# Altium PCB GaN_Single_Bridge.PcbDoc
Units mil, origin at the board's own origin, x right, y up, seen from the top; angles counter-clockwise.
Board outline 4724.41 x 2755.91 mil, 4 copper layers (Top Layer, Layer 1, Layer 2, Bottom Layer), stack 23.756 mil thick; 76 components, 36 nets, 233 pads, 112 vias.
Unrouted connection lines stored in the file: 26.
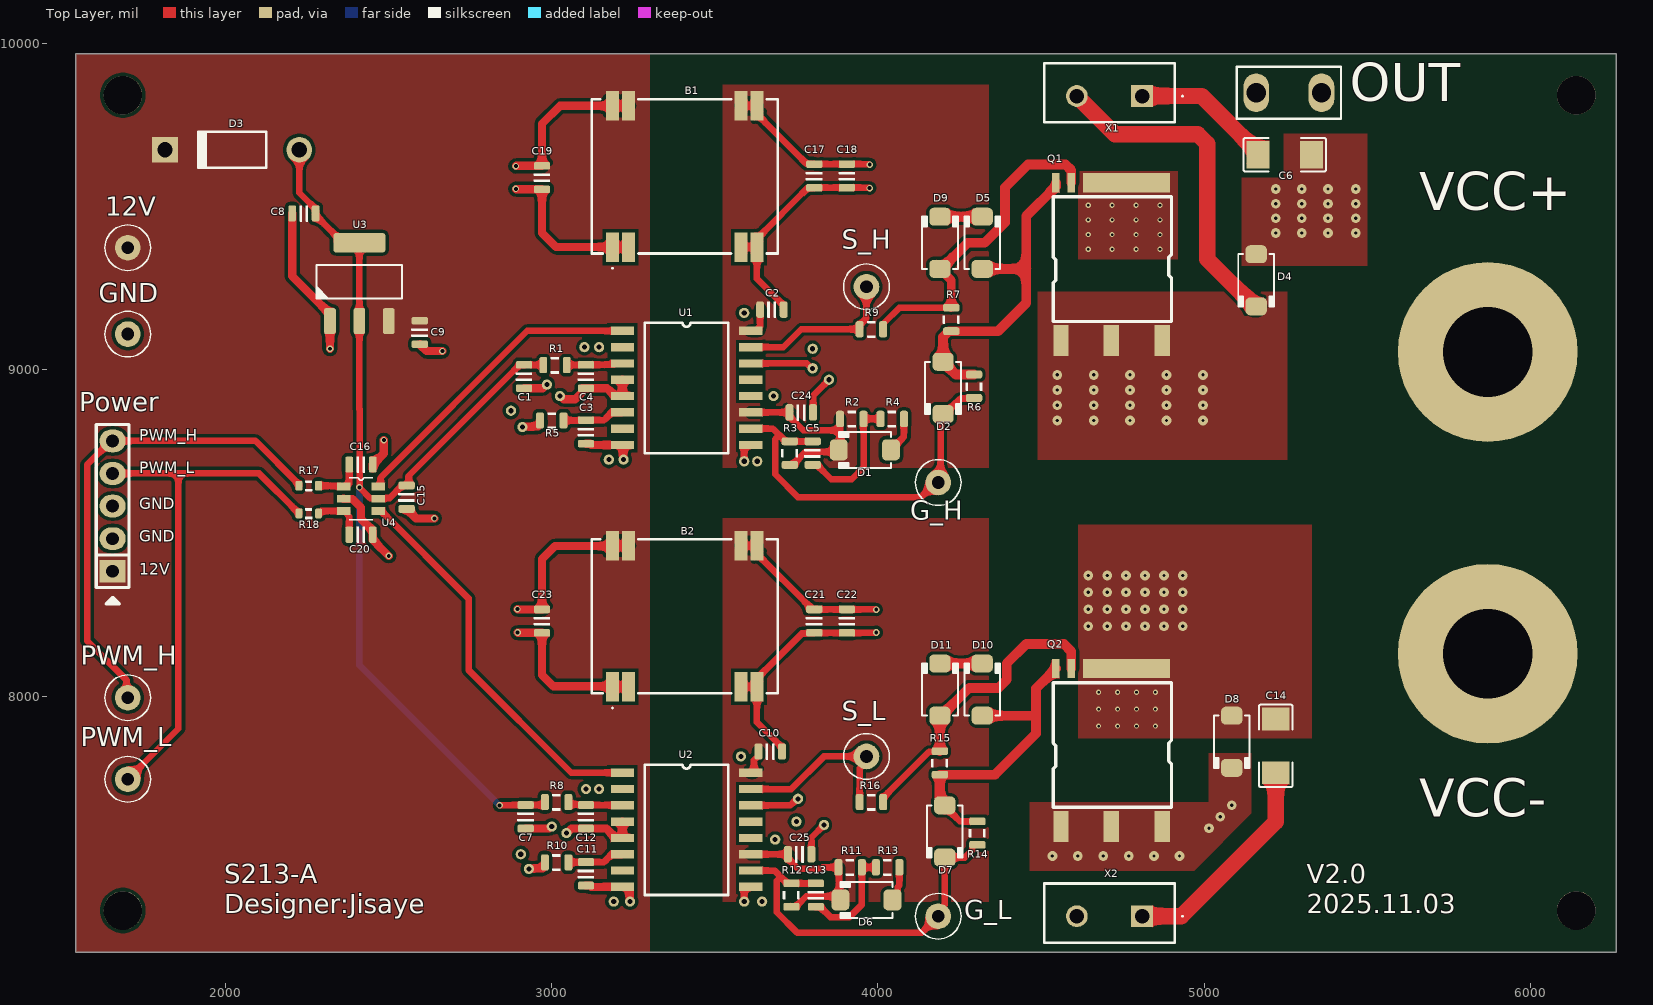
[diagram p0: Top Layer view]
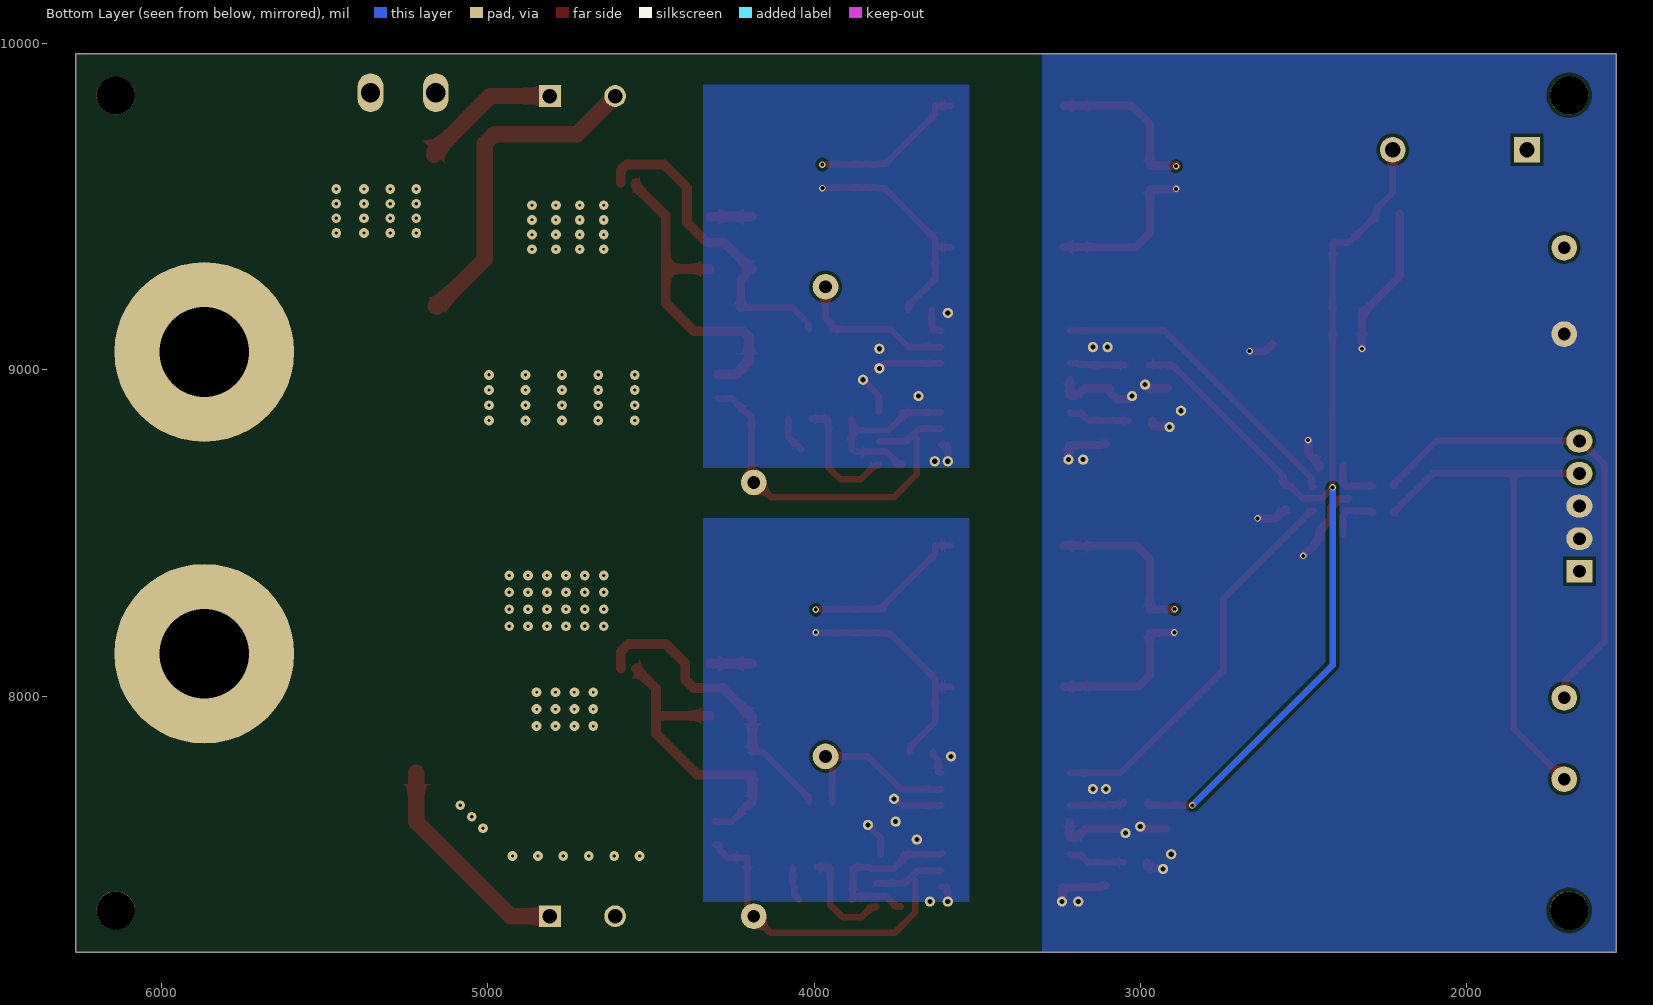
[diagram p1: Bottom Layer view, seen from below]
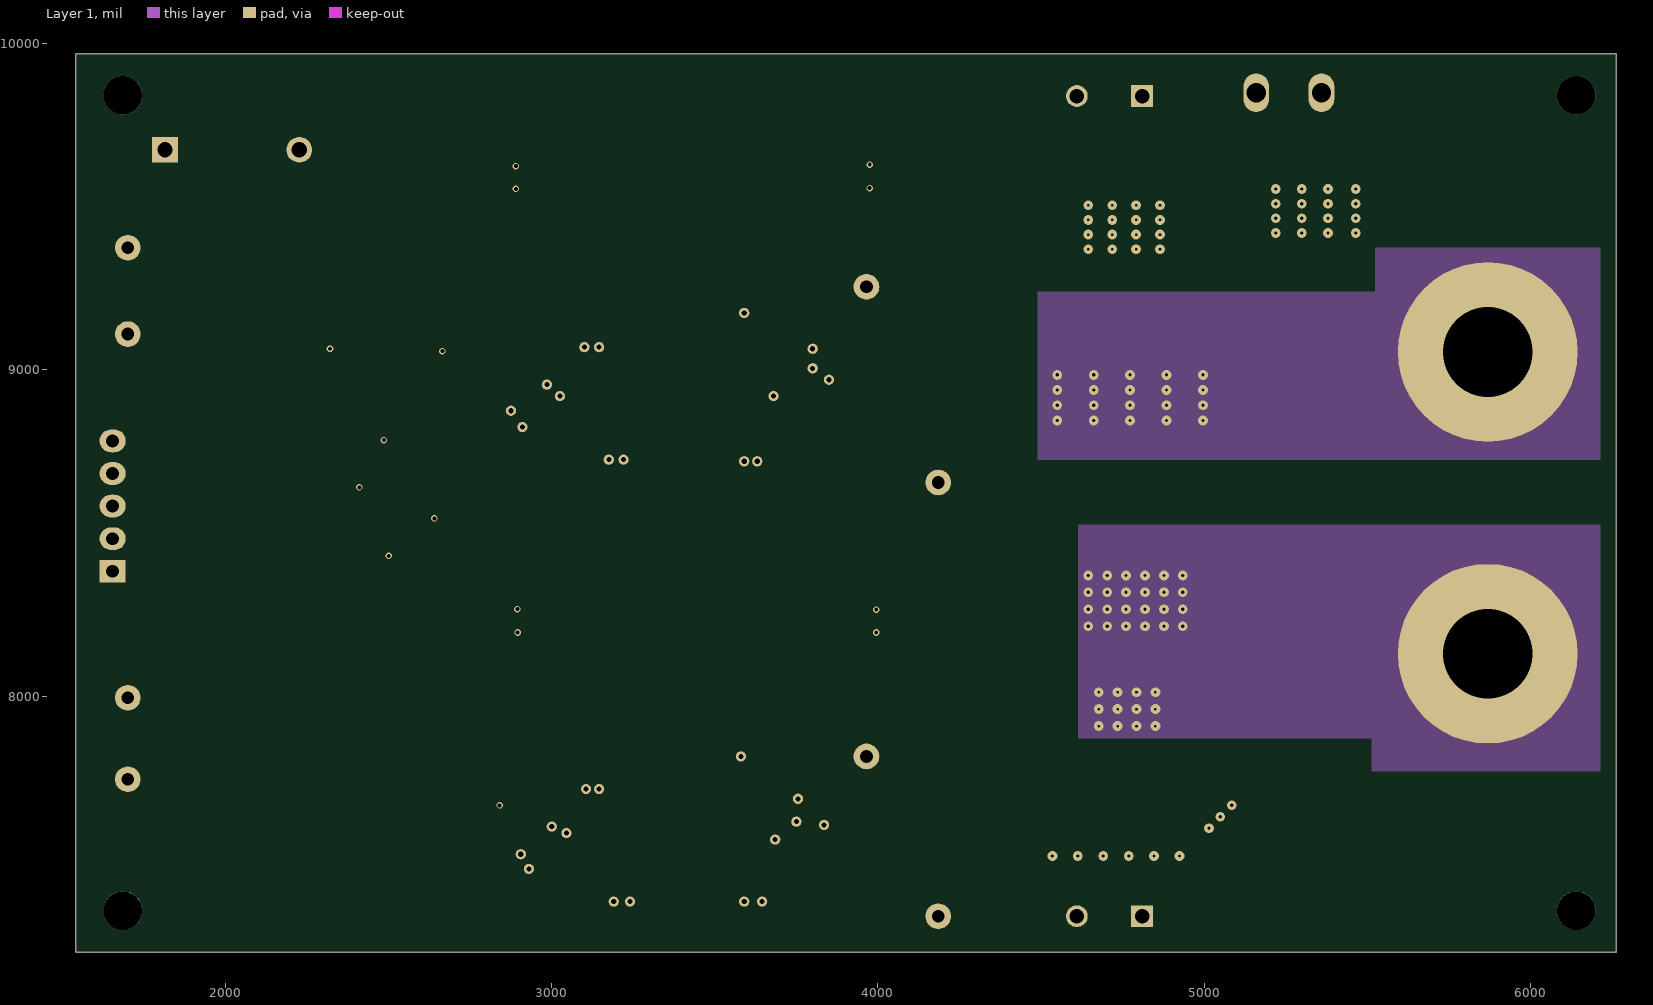
[diagram p2: Layer 1]
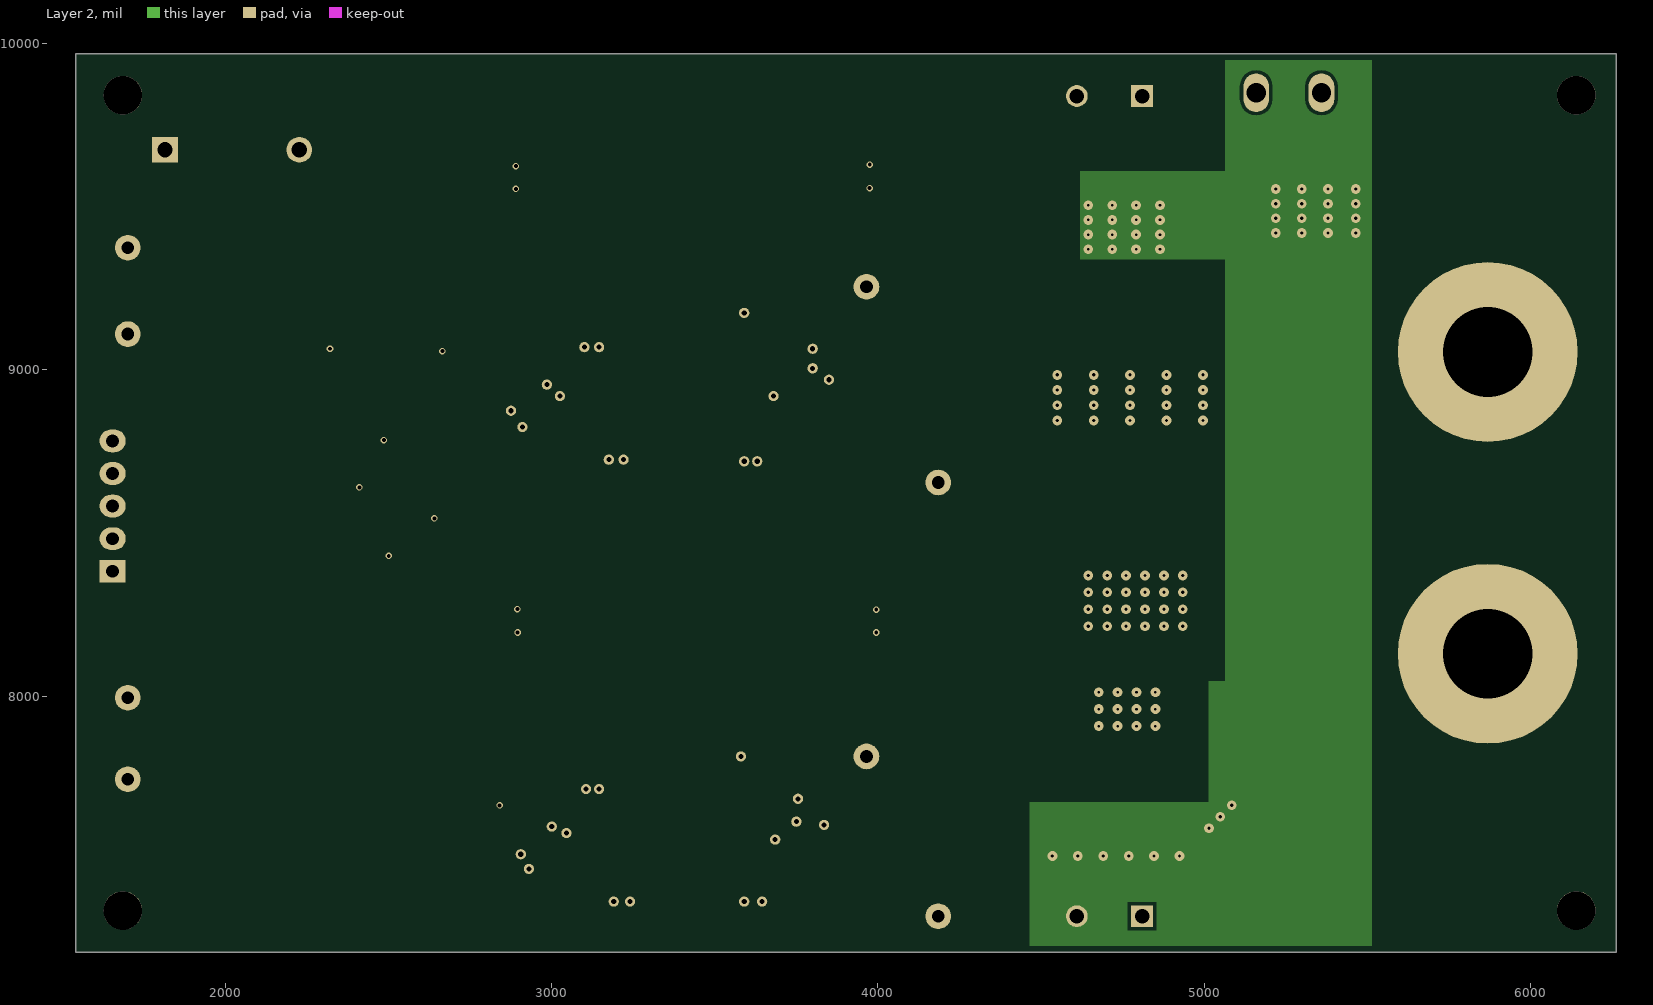
[diagram p3: Layer 2]
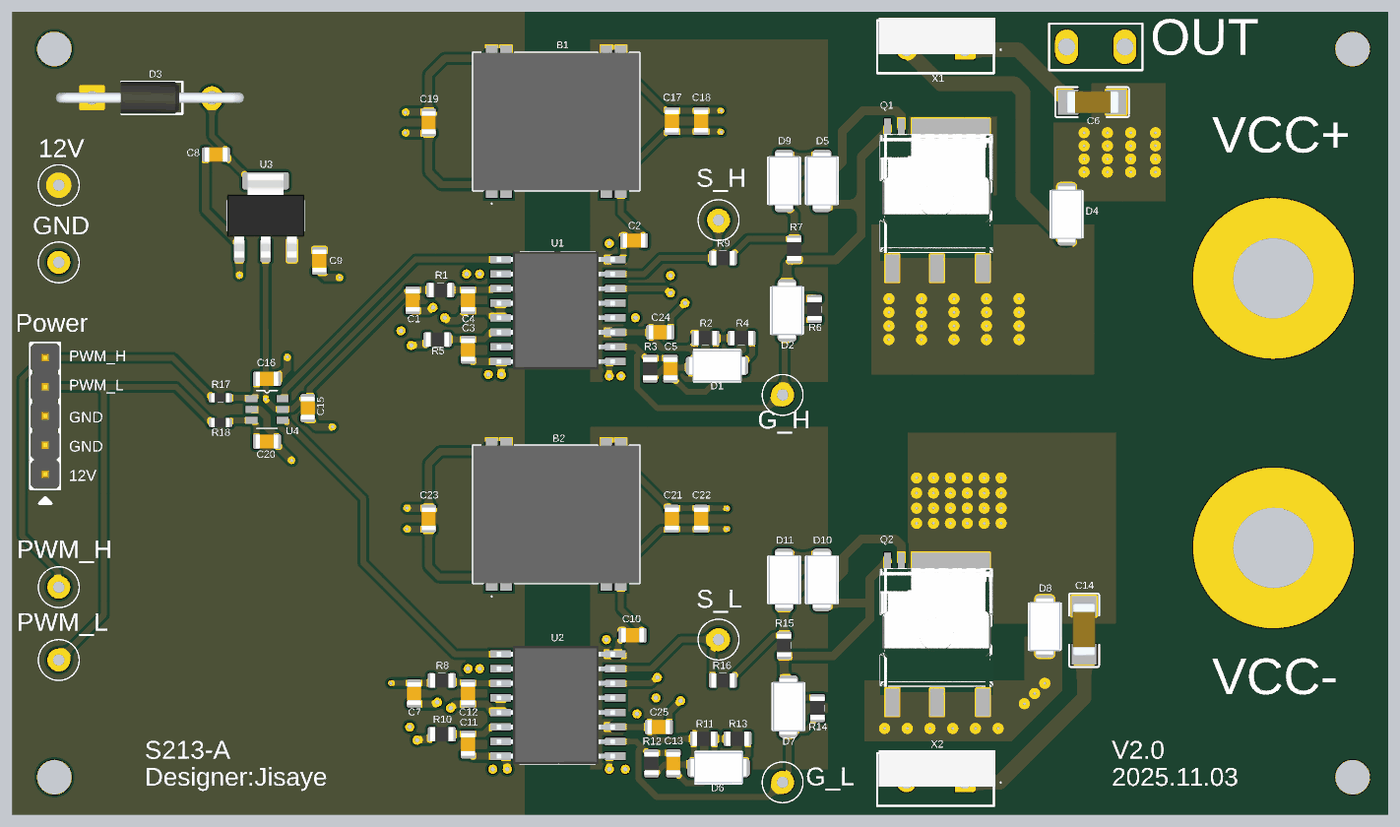
[diagram p4: 3D render of the assembled board from above, using the file's embedded part models]

## Layer stack, top to bottom
Top Solder: solder mask 0.4, Solder Resist, Dk 3.5
Top Layer: signal copper 1.4
Dielectric 2: prepreg 2.8, PP-006, Dk 4.1
Layer 1: signal copper 1.378
Dielectric 1: dielectric 12.6, FR-4, Dk 4.8
Layer 2: signal copper 1.378
Dielectric 3: prepreg 2.8, PP-006, Dk 4.1
Bottom Layer: signal copper 1.4
Bottom Solder: solder mask 0.4, Solder Resist, Dk 3.5

## Board outline
1540,7214.09 1540,9970 6264.41,9970 6264.41,7214.09

## Design rules (kind name [scope] priority, off if disabled: settings)
Clearance [All] p1: gap=10 ignorepadtopadclearanceinfootprint=FALSE except(0: Arc-Hole Track-Hole SMDPad-Hole THPad-Hole Via-Hole Fill-Hole Poly-Hole Region-Hole Text-Hole)
PlaneClearance [All] p1: clearance=7
PlaneConnect [All] p1: planeconnectstyle=Direct reliefexpansion=20 reliefentries=4 reliefconductorwidth=10 reliefairgap=10
PolygonConnect [All] p1: connectstyle=Direct reliefconductorwidth=10 reliefentries=4 polygonreliefangle="90 Angle" airgapwidth=10
RoutingVias [All] p1: holewidth=12 width=20 viastyle="Through Hole" minholewidth=1 minwidth=1 maxholewidth=30 maxwidth=50
SolderMaskExpansion [All] p1: expansion=4 istentingtop=FALSE
Width VCC- [InNet('NetC14_1')] p1: maxlimit=60 minlimit=10 preferedwidth=50 toplayer_minwidth=40 midlayer1_maxwidth=10 midlayer1_prefwidth=10 midlayer2_maxwidth=10 midlayer2_prefwidth=10 bottomlayer_minwidth=40 minimp=50.000000 maximp=50.000000 favimp=50.000000
Width VCC+ [InNet('NetD4_2')] p2: maxlimit=60 minlimit=10 preferedwidth=50 toplayer_minwidth=40 midlayer1_maxwidth=10 midlayer1_prefwidth=10 midlayer2_maxwidth=10 midlayer2_prefwidth=10 bottomlayer_minwidth=40 minimp=50.000000 maximp=50.000000 favimp=50.000000
Width GND [InNet('GND')] p3: maxlimit=30 minlimit=10 preferedwidth=25 toplayer_minwidth=20 midlayer1_maxwidth=10 midlayer1_prefwidth=10 midlayer2_maxwidth=10 midlayer2_prefwidth=10 bottomlayer_minwidth=20 minimp=50.000000 maximp=50.000000 favimp=50.000000
Width 12V [InNet('12V')] p4: maxlimit=60 minlimit=10 preferedwidth=40 toplayer_minwidth=20 midlayer1_maxwidth=10 midlayer1_prefwidth=10 midlayer2_maxwidth=10 midlayer2_prefwidth=10 bottomlayer_minwidth=20 minimp=50.000000 maximp=50.000000 favimp=50.000000
Width 5V [InNet('5V')] p5: maxlimit=30 minlimit=10 preferedwidth=25 toplayer_minwidth=20 midlayer1_maxwidth=10 midlayer1_prefwidth=10 midlayer2_maxwidth=10 midlayer2_prefwidth=10 bottomlayer_minwidth=20 minimp=50.000000 maximp=50.000000 favimp=50.000000
Width signal [All] p6: maxlimit=60 minlimit=10 preferedwidth=25 toplayer_minwidth=20 midlayer1_maxwidth=10 midlayer1_prefwidth=10 midlayer2_maxwidth=10 midlayer2_prefwidth=10 bottomlayer_minwidth=20 minimp=50.000000 maximp=50.000000 favimp=50.000000
28 further rules are at their usual default settings.

## Components (designator, comment, footprint, x,y, rotation, side; value= is the part's Value field where it differs from the comment)
12V "TEST" TESTPOINT 1700,9375 r0 top (schematic designator T3)
B1 "MGN1S1208MC-R7" MGN1S1208MCR7 3407.76,9593.46 r0 top
B2 "MGN1S1208MC-R7" MGN1S1208MCR7 3407.76,8245 r0 top
C1 "C0805" CAP_0805 2915,8980 r90 top value=0.1uF
C2 "C0805" CAP_0805 3675,9185 r0 top value=0.1uF
C3 "C0805" CAP_0805 3105,8810 r270 top value=330pF
C4 "C0805" CAP_0805 3105,8980 r270 top value=22nF
C5 "C0805" CAP_0805 3800,8745 r90 top value=3.3nF
C6 "GR442QR73D102KW01L" 1808 5330,9660 r180 top value=1nF
C7 "C0805" CAP_0805 2920,7630 r90 top value=0.1uF
C8 "C0805" CAP_0805 2240,9480 r0 top value=1uF
C9 "C0805" CAP_0805 2595,9115 r90 top value=1uF
C10 "C0805" CAP_0805 3670,7830 r0 top value=0.1uF
C11 "C0805" CAP_0805 3105,7455 r270 top value=330pF
C12 "C0805" CAP_0805 3105,7630 r270 top value=22nF
C13 "C0805" CAP_0805 3810,7390 r90 top value=3.3nF
C14 "GR442QR73D102KW01L" 1808 5220,7929.76 r270 top value=1nF
C15 "C0805" CAP_0805 2555,8610 r90 top value=0.1uF
C16 "C0805" CAP_0805 2415,8710 r0 top value=100pF
C17 "C0805" CAP_0805 3805,9595 r90 top value=10uF
C18 "C0805" CAP_0805 3905,9595 r90 top value=1uF
C19 "C0805" CAP_0805 2970,9590 r90 top value=1uF
C20 "C0805" CAP_0805 2415,8495 r180 top value=100pF
C21 "C0805" CAP_0805 3805,8230 r90 top value=1uF
C22 "C0805" CAP_0805 3905,8230 r90 top value=10uF
C23 "C0805" CAP_0805 2970,8230 r90 top value=1uF
C24 "C0805" CAP_0805 3765,8870 r0 top value=0.1uF
C25 "C0805" CAP_0805 3760,7515 r0 top value=0.1uF
D1 "NAME" DO-214AC 3960,8755 r180 top
D2 "NAME" DO-214AC 4200,8945 r270 top
D3 "Diode 1N4002" DO-41 2020,9675 r180 top
D4 "NAME" DO-214AC 5160,9275 r270 top
D5 "NAME" DO-214AC 4320,9390 r90 top
D6 "NAME" DO-214AC 3965,7375 r180 top
D7 "NAME" DO-214AC 4205,7585 r270 top
D8 "NAME" DO-214AC 5085,7860 r270 top
D9 "NAME" DO-214AC 4190,9390 r90 top
D10 "NAME" DO-214AC 4320,8020 r90 top
D11 "NAME" DO-214AC 4190,8020 r90 top
G_H "TEST" TESTPOINT 4185,8655 r0 top (schematic designator T5)
G_L "TEST" TESTPOINT 4185,7325 r0 top (schematic designator T7)
GND "TEST" TESTPOINT 1700,9110 r0 top (schematic designator T4)
OUT "OUT" OUT 5260,9850 r0 top (schematic designator H2)
Power "HDR1x5" PIN-5-2.54-1.0 1653.54,8582.68 r90 top (schematic designator J1)
PWM_H "TEST" TESTPOINT 1700,7995 r0 top (schematic designator T1)
PWM_L "TEST" TESTPOINT 1700,7745 r0 top (schematic designator T2)
Q1 "IGT60R070D1ATMA1" IGT60R070D1ATMA1 4923.66,9460 r270 top
Q2 "IGT60R070D1ATMA1" IGT60R070D1ATMA1 4923.66,7970.08 r270 top
R1 "R0805" RES_0805 3010,9015 r180 top value=470
R2 "R0805" RES_0805 3920,8850 r0 top value=10
R3 "R0805" RES_0805 3730,8745 r90 top value=500
R4 "R0805" RES_0805 4044,8850 r180 top value=2
R5 "R0805" RES_0805 3000,8845 r0 top value=18k
R6 "R0805" RES_0805 4295,8950 r90 top value=0
R7 "R0805" RES_0805 4225,9155 r270 top value=10
R8 "R0805" RES_0805 3015,7675 r0 top value=470
R9 "R0805" RES_0805 3980,9125 r0 top value=0
R10 "R0805" RES_0805 3015,7490 r0 top value=18k
R11 "R0805" RES_0805 3915,7475 r0 top value=10
R12 "R0805" RES_0805 3735,7390 r90 top value=500
R13 "R0805" RES_0805 4030,7475 r180 top value=2
R14 "R0805" RES_0805 4305,7580 r90 top value=0
R15 "R0805" RES_0805 4190,7795 r270 top value=10
R16 "R0805" RES_0805 3980,7675 r0 top value=0
R17 "R0603" RES_0603 2255,8645 r0 top value=1k
R18 "R0603" RES_0603 2255,8560 r0 top value=1k
S_H "TEST" TESTPOINT 3965,9255 r0 top (schematic designator T6)
S_L "TEST" TESTPOINT 3965,7815 r0 top (schematic designator T8)
U1 "1EDS5663H" 1EDS5663H 3216.3,9120 r0 top
U2 "1EDS5663H" 1EDS5663H 3216.3,7765 r0 top
U3 "TLV1117" SOT223-3 2410,9270 r90 top
U4 "SN74LVC2G17" SOT-23-6 2415,8605 r0 top
VCC+ "VCC+" HOLE#1 5870,9095 r0 top (schematic designator H1)
VCC- "VCC-" HOLE#2 5870,7885 r0 top (schematic designator H3)
X1 "TR35JBX50L0" TR35JBX50L0 4810,9840 r180 top value=51
X2 "TR35JBX50L0" TR35JBX50L0 4810,7325 r180 top value=51

## Footprints (in the part's own frame and the unit in brackets; to place one, negate y for a bottom-side part, rotate by r counter-clockwise, add the part's x,y. Pads: shape width x height; smd on the part's side, far side on the other; paste and mask are expansions set on the pad)
1EDS5663H [mm]
  rect 1.8x0.65 smd: 1(0,0) 2(0,-1.27) 3(0,-2.54) 4(0,-3.81) 5(0,-5.08) 6(0,-6.35) 7(0,-7.62) 8(0,-8.89) 9(10,-8.89) 10(10,-7.62) 11(10,-6.35) 12(10,-5.08) 13(10,-3.81) 14(10,-2.54) 15(10,-1.27) 16(10,0)
  silkscreen extent 1.73,-9.53 8.27,0.64, body extent -0.32,-9.59 9.98,0.7, height 2.65
1808 [mm]
  rect 1.785x2.16 smd: 1(0,0) 2(4.185,0)
  silkscreen extent -1.12,-1.31 5.31,1.31, body extent -0.27,-1 4.33,1, height 2.2
CAP_0805 [mil]
  rrect50% 24x50 smd: 1(-36,0) 2(36,0)
  silkscreen extent -12,-24 12,24, body extent -39,-25 39,25, height 39
DO-41 [mm] "Diode, Axial; Body 5.2 x 2.7 mm (LxDia. max), Lead Dia. 0.86 mm (max)"
  round 2 hole 1.2: 1(-5.23,0)
  rect 2x2 hole 1.2: 2(5.23,0)
  silkscreen extent -2.65,-1.4 2.75,1.4, body extent -8.02,-1.4 8.38,1.38, height 2.8
DO-214AC [mil] "SMA"
  rrect50% 55x65 smd: 1(-80,0) 2(80,0)
  silkscreen extent -80,-55 80,55, body extent -98,-53 98,53, height 85
HOLE#1 [mm]
  round 14 hole 7: 1(0,-1.013)
HOLE#2 [mm]
  round 14 hole 7: 1(0,6.221)
IGT60R070D1ATMA1 [mm]
  rect 1.5x6.8 smd: 1(-2.9,-4.1)
  rect 1.5x0.6 smd: 2(-2.9,-8.4) 3(-2.9,-9.6)
  rect 2.4x1.2 smd: 4(9.4,-1.3) 4(9.4,-9.2) 4(9.4,-5.3)
  silkscreen extent -1.8,-9.8 7.9,-0.6, body extent -2.92,-10.29 8.76,-0.39, height 2.3
MGN1S1208MCR7 [mm]
  rect 1x2.3 smd: 1(-5.625,-5.5) 2(-4.375,-5.5) 9(4.375,-5.5) 10(5.625,-5.5) 11(5.625,5.5) 12(4.375,5.5) 19(-4.375,5.5) 20(-5.625,5.5)
  silkscreen extent -7.25,-7.2 7.25,6, body extent -7.25,-6 7.25,6, height 4.8
OUT [mm]
  oval 2x3 hole 1.5: 1(-2.54,0) 1(2.54,0)
  silkscreen extent -4.06,-2.03 4.06,2.03, body extent -3.15,-0.4 3.15,0.4, height 10
PIN-5-2.54-1.0 [mil] "Pin Header"
  rect 70x80 hole 39.37: 1(-200,0)
  oval 70x80 hole 39.37: 2(-100,0) 3(0,0) 4(100,0) 5(200,0)
  silkscreen extent -300,-50 250,50, body extent -250,-50 250,50, height 398
RES_0603 [mil]
  rrect50% 22x30 smd: 1(-30,0) 2(30,0)
  silkscreen extent -10,-16 10,16, body extent -31,-16 31,16, height 18
RES_0805 [mil]
  rrect50% 24x50 smd: 1(-36,0) 2(36,0)
  silkscreen extent -12,-24 12,24, body extent -39,-25 39,25, height 24
SOT223-3 [mil]
  rrect40% 80x36 smd: 1(-120,90.16) 2(-120,0) 3(-120,-90.16)
  rrect30% 60x160 smd: 4(120,0)
  silkscreen extent -51,-131 51,131, body extent -144,-132 144,132, height 71
SOT-23-6 [mm] "Small Outline Transistor, 6 Pins, Pin Pitch  0.95mm"
  rect 1.05x0.6 smd mask+0.07: 1(-1.35,0.95) 2(-1.35,0) 3(-1.35,-0.95) 4(1.35,-0.95) 5(1.35,0) 6(1.35,0.95)
  silkscreen extent -0.9,-1.65 0.9,1.65, body extent -1.4,-1.45 1.4,1.45, height 1.45
TESTPOINT [mm]
  round 2 hole 1: 1(0,0)
  silkscreen extent -1.78,-1.78 1.78,1.78, body extent -1.58,-1.59 1.58,1.59, height 4.44
TR35JBX50L0 [mm]
  rect 1.695x1.695 hole 1.13: 1(0,0)
  round 1.695 hole 1.13: 2(5.08,0)
  silkscreen extent -3.2,-2.55 7.62,2.05, body extent -2.67,-2.8 7.49,0.38, height 18.08

## Part data
B1 B2: "Isolated Module DC DC Converter 1 Output 8V 125mA 10.8V - 13.2V Input", Manufacturer_Name="Murata Electronics", Datasheet Link=https://www.murata.com/products/productdata/8819021971486/KDC-MGN1.pdf, Geometry.Height=4.7mm, Manufacturer_Part_Number=MGN1S1208MC-R7
C1 C2 C3 C4 C5 C7 C8 C9 C10 C11 C12 C13 C15 C16 C17 C18 C19 C20 C21 C22 C23 C24 C25: library part Cap_0805, "Capacitor", Note=±10%, Specification="X7R, ±10%, 16V", Type=0805
C6 C14: library part 1808, JLCPCB Part Class="Extended Part", LCSC Part Name="1nF ±10% 2kV", Manufacturer=muRata(村田), Temperature Coefficient=X7R, Tolerance=±10%, Voltage Rated=2kV, Add into BOM=yes, Convert to PCB=yes, Datasheet=https://atta.szlcsc.com/upload/public/pdf/source/20180307/C76916_15204090833591407706.pdf, Device=GR442QR73D102KW01L, Manufacturer Part=GR442QR73D102KW01L, Name=1nF, Supplier=LCSC, Supplier Footprint=1808, Supplier Part=C76916, Symbol=GR442QR73D102KW01L
D1 D2 D4 D5 D6 D7 D8 D9 D10 D11: library part Diode_SMA, "Diode", Type=SMA
D3: "1 Amp General Purpose Rectifier", Code_JEDEC=DO-204-AL, ComponentLink1Description="Manufacturer Link", ComponentLink1URL=http://www.fairchildsemi.com/, ComponentLink2Description=Datasheet, ComponentLink2URL=http://www.fairchildsemi.com/ds/1N%2F1N4001.pdf, DatasheetVersion=1998, LatestRevisionDate=17-Jul-2002, LatestRevisionNote="Re-released for DXP Platform.", PackageDescription="Diode, Axial; Body 5.2 x 2.7 mm (LxDia. max), Lead Dia. 0.86 mm (max)", PackageReference=DO-41, PackageVersion=Aug-1999, Published=8-Jun-2000, Publisher="Altium Limited"
OUT VCC+ VCC-: library part HOLE
Power: "Connector"
R1 R2 R3 R4 R5 R6 R8 R9 R10 R11 R12 R13 R14 R16: library part Res_0805, "Resistor", Note=±1%, Specification=±1%, Type=0805
R7 R15: library part Res_0805, "Resistor_uncertain", Note=±1%, Specification=±1%, Type=0805
R17 R18: library part Res_0603, "Resistor", Note=±1%, Specification=±1%, Type=0603
U3: "Power"
U4: library part SOT-23-6
X1 X2: "RES, TO-220, 0.05 ohm, 5%, 35W", Manufacturer_Name="Stackpole Electronics, Inc.", Datasheet Link=https://www.seielect.com/Catalog/SEI-TR.pdf, Geometry.Height=15.3mm, Manufacturer_Part_Number=TR35JBX50L0

## Free pads (board coordinates)
  round 31.5 hole 15.75: 1(2985,8955) 2(3025,8920) 3(3100,9070) 4(3145,9070) 5(2875,8875) 6(2910,8825) 7(3175,8725) 8(3220,8725) 9(3590,8720) 10(3630,8720) 11(3680,8920) 12(3800,9065) 13(3800,9005) 14(3850,8970) 15(3590,9175) 16(3145,7715) 17(3105,7715) 18(3000,7600) 19(3045,7580) 20(2905,7515) 21(2930,7470) 22(3190,7370) 23(3240,7370) 24(3580,7815) 25(3755,7685) 26(3750,7615) 27(3835,7605) 28(3590,7370) 29(3645,7370) 30(3685,7560)
  round 118.11 hole 118.11: 33(1685,9842.52) 34(1685,7342.52) 35(6141.73,9842.52) 36(6141.73,7342.52)

## Via types
v1: diameter 30, hole 10, Top Layer to Bottom Layer, 69 vias
v2: diameter 15.75/30/30/30 (per signal layer), hole 7.87, Top Layer to Bottom Layer, 28 vias
v3: diameter 20, hole 12, Top Layer to Bottom Layer, 15 vias

## Nets (pads, with @x,y where several pads share a name; then routed paths per layer and width w, separated by ;. In a path a pad name is that pad's centre, name@x,y a point inside that pad or via, vN(x,y) a via of type N, cw(c..) or ccw(c..) an arc to the next point about the centre after c; other vN are vias at no path point)
5V: C1.2 C7.2 C8.2 C15.2 D3.1 R1.2 R8.1 U3.2 U3.4 U4.5 | length 3209.1
  Top Layer w20: D3.1 2225.91,9543.09 2276,9493 C8.2 2276,9467 2278,9465 2285,9465 2360,9390 U3.4 U3.2 2410,8879.89 2411,8878.89 v3@2411,8640 ; v3@2411,8638.79 2442.98,8606.81 2466.34,8606.81 U4.5 2469.96,8606.81 2502.81,8606.81 2542,8646 2559.46,8646 2561.46,8648 2561.46,8675.46 2902,9016 C1.2 2915.5,9015.5 2973.5,9015.5 R1.2 ; v3(2840,7665) 2841,7666 C7.2 2977,7666 2979,7668 R8.1
  Bottom Layer w20: v3(2410,8640) 2410,8095 v3(2840,7665)
8V_H: B1.11 B1.12 C2.1 C17.2 C18.2 C24.1 D1.2 R2.1 R3.1 U1.11 U1.16 | length 1147.7
  Top Layer w20: B1.12 B1.11 3629.21,9784.41 3780.62,9633 3803,9633 C17.2 C18.2 3974,9631 v3(3975,9630) ; U1.11 C24.1 3729,8857 3771,8815 3884,8815 ; U1.16 3632.64,9120 3635.43,9122.8 3635.43,9130.94 3639,9134.51 C2.1 ; R3.1 3743,8709 3745,8711 3745,8715.77 3778.23,8749 3874,8749 D1.2 3884,8759 3884,8815 ; R2.1 3884,8815
8V_L: B2.11 B2.12 C10.1 C21.2 C22.2 C25.1 D6.2 R11.1 R12.1 U2.11 U2.16 | length 1160.8
  Top Layer w20: B2.12 B2.11 3629.21,8435.94 3790,8275.16 3790,8268 3792,8266 C21.2 C22.2 3994,8266 v3(3995,8265) ; U2.11@3607.2,7517.8 U2.11 C25.1 3724,7502 3756,7470 3825.62,7470 3830.62,7475 R11.1 3881,7473 D6.2@3881,7379 ; U2.16 3617.2,7765 3620,7767.8 3620,7803.28 3631.72,7815 3632,7815 3634,7817 C10.1 ; R12.1 3748,7354 3780,7386 3874,7386 D6.2@3881,7379 ; D6.2 D6.2@3881,7379
12V: 12V.1 B1.19 B1.20 B2.19 B2.20 C9.2 C19.2 C23.2 D3.2 Power.1 U3.3 | length 1014.9
  Top Layer w25: v3(2890,9625) 2891,9626 C19.2 2970,9755 3025,9810 B1.20 B1.19 ; v3(2894.88,8266.81) 2895.69,8266 C23.2 2970,8420 3010,8460 3184.76,8460 B2.20 B2.19
  Top Layer w40: Power.1@1648.54,8382.68 Power.1
G_H: C5.2 D2.2 G_H.1 R3.2 R6.1 U1.10 | length 1211
  Top Layer w20: U1.10 3678,8820 3697.5,8800.5 ; C5.2 R3.2 3717,8781 3697.5,8800.5 ; R6.1 4293,8912 4252,8912 4205,8865 D2.2 4192.5,8857.5 4192.5,8662.5 G_H.1 4176.9,8655 4131.9,8610 3755,8610 3685,8680 3685,8788 3697.5,8800.5
G_L: C13.2 D7.2 G_L.1 R12.2 R14.1 U2.10 | length 1183.1
  Top Layer w20: U2.10 3683,7465 3702.5,7445.5 ; C13.2 R12.2 3722,7426 3702.5,7445.5 ; R14.1 4292,7544 4290,7542 4290,7529 4266,7505 D7.2 4205,7360.9 4185,7340.9 G_L.1 4135,7275 3752.23,7275 3690,7337.23 3690,7433 3702.5,7445.5
GND: B1.1 B1.2 B2.1 B2.2 C1.1 C3.2 C4.2 C7.1 C8.1 C9.1 C11.2 C12.2 C15.1 C16.2 C19.1 C20.1 C23.1 GND.1 pad.1 pad.2 pad.3 pad.4 pad.5 pad.6 pad.7 pad.8 pad.16 pad.17 pad.18 pad.19 pad.20 pad.21 pad.22 pad.23 Power.2 Power.3 R5.1 R10.1 U1.4 U1.5 U1.8 U2.4 U2.5 U2.8 U3.1 U4.2 | length 3119.8
  Top Layer w25: C8.1 2204,9287.84 2319.84,9172 U3.1 2319.84,9065.16 v3(2320,9065) ; U4.2 2362.54,8604.31 2389.44,8604.31 2415.14,8578.6 2415.14,8542.86 2451,8507 C20.1 2451,8479 v3(2500,8430) ; C16.2@2451,8698 C16.2 2485,8744 v3(2485,8785) ; C15.1 2584,8545 v3(2640,8545) ; C9.1 2616.19,9057.81 v3(2664.59,9057.81) ; v3(2890,9555) 2891,9554 C19.1 2970,9420 3013.07,9376.93 B1.1 B1.2 ; v3(2895,8195) 2896,8194 C23.1 2970,8065 3005,8030 3184.76,8030 B2.1 B2.2 ; pad.6 2911.24,8826.24 2957.24,8826.24 2964,8833 R5.1 ; C1.1 2972.24,8944 2983.24,8955 pad.1 ; C7.1 2992.24,7594 2998.24,7600 pad.18 ; pad.21 2931.24,7471.24 2972.24,7471.24 2979,7478 R10.1 ; pad.2 3026.76,8920 3036.76,8910 3071,8910 3092.5,8931.5 3092.5,8943.5 3093,8944 3169.66,8944 3193.66,8920 U1.5 U1.4 ; pad.19 3046.76,7580 3060.26,7593.5 3104.5,7593.5 C12.2 3167.5,7594 3193.37,7568.13 3193.37,7565.3 3193.66,7565 U2.5 U2.4 ; C11.2 3117,7419 3121,7415 U2.8 3238.46,7415 3238.76,7414.7 3238.76,7371.24 pad.23 ; C3.2 3117,8774 3121,8770 U1.8 3218.46,8770 3218.76,8769.7 3218.76,8726.24 pad.8
GND_H: B1.9 B1.10 C2.2 C17.1 C18.1 C24.2 pad.9 pad.10 pad.11 pad.12 pad.13 pad.14 pad.15 U1.9 U1.14 | length 1096.5
  Top Layer w20: B1.9 B1.10 ; pad.9 3590,8767.2 3592.8,8770 U1.9 ; U1.14 3781.89,9020 3796.89,9005 pad.13 ; C2.2 3711,9198 3629.21,9279.79 B1.10 ; C24.2 3801,8921 pad.14 ; v3(3974.8,9557.62) 3973.41,9559 C18.1 C17.1 3803,9557 3783.69,9557 3629.21,9402.52 B1.10
GND_L: B2.9 B2.10 C10.2 C21.1 C22.1 C25.2 pad.24 pad.25 pad.26 pad.27 pad.28 pad.29 pad.30 U2.9 U2.14 | length 1052
  Top Layer w20: B2.9 B2.10 ; pad.28 3590,7412.2 3592.8,7415 U2.9 ; U2.14 3731.89,7665 3751.89,7685 pad.25 ; C10.2 3706,7843 3629.21,7919.79 B2.10 ; C25.2 3796,7566 pad.27 ; v3(3995,8195) 3994,8194 C22.1 C21.1 3803,8192 3767.16,8192 3629.21,8054.06 B2.10
NetC3_1: C3.1 R5.2 U1.6 | length 190.7
  Top Layer w20: R5.2 3036.5,8845.5 3104.5,8845.5 C3.1 3160,8846 3181.2,8867.2 3213.5,8867.2 U1.6
NetC4_1: C4.1 R1.1 U1.3 | length 172.4
  Top Layer w20: R1.1 3046.5,9015.5 3104.5,9015.5 C4.1 3189.66,9016 3193.66,9020 U1.3
NetC5_1: C5.1 R2.2 R4.2 | length 390.1
  Top Layer w20: C5.1 3813,8709 3857,8665 3920,8665 3956,8701 R2.2 R4.2
NetC6_1: C6.1 D4.1 D8.2 Q1.1 Q2.4 X2.2
  other v1: 4535,7510 4613,7510 4691,7510 4769,7510 4847,7510 4925,7510 5015,7595 5050,7630 5085,7665 5220,9420 5300,9420 5380,9420 5465,9420 5220,9465 5300,9465 5380,9465 5465,9465 5220,9510 5300,9510 5380,9510 5465,9510 5220,9555 5300,9555 5380,9555 5465,9555
  other v2: 4645,9370 4718.33,9370 4791.67,9370 4865,9370 4645,9415 4718.33,9415 4791.67,9415 4865,9415 4645,9460 4718.33,9460 4791.67,9460 4865,9460 4645,9505 4718.33,9505 4791.67,9505 4865,9505
NetC6_2: C6.2 X1.1 | length 434.1
  Top Layer w50: X1.1 4992.62,9840 5165.24,9667.38 C6.2
NetC11_1: C11.1 R10.2 U2.6 | length 175.7
  Top Layer w20: R10.2 3051.5,7490.5 3104.5,7490.5 C11.1 3160,7491 3181.2,7512.2 3213.5,7512.2 U2.6
NetC12_1: C12.1 R8.2 U2.3 | length 172.4
  Top Layer w20: R8.2 3051,7670 3053,7668 3103,7668 C12.1 3105.5,7665.5 3215.8,7665.5 U2.3
NetC13_1: C13.1 R11.2 R13.2 | length 327.1
  Top Layer w20: C13.1 3823,7354 3854.5,7322.5 3912.73,7322.5 3951,7360.77 R11.2 R13.2
NetC14_1: C14.1 D8.1 Q2.1 VCC-.1
  other v1: 4645,8214.38 4703,8214.38 4761,8214.38 4819,8214.38 4877,8214.38 4935,8214.38 4645,8266.25 4703,8266.25 4761,8266.25 4819,8266.25 4877,8266.25 4935,8266.25 4645,8318.12 4703,8318.12 4761,8318.12 4819,8318.12 4877,8318.12 4935,8318.12 4645,8370 4703,8370 4761,8370 4819,8370 4877,8370 4935,8370
  other v2: 4677,7908.12 4735,7908.12 4793,7908.12 4851,7908.12 4677,7960 4735,7960 4793,7960 4851,7960 4677,8011.88 4735,8011.88 4793,8011.88 4851,8011.88
NetC14_2: C14.2 X2.1 | length 680.1
  Top Layer w50: X2.1 4930,7325 5220,7615 C14.2
NetC16_1: C16.1 R17.2 U4.1 | length 157.8
  Top Layer w20: R17.2 2350.39,8645 2352.99,8642.4 U4.1 2370.71,8642.4 2379,8650.69 C16.1
NetC20_2: C20.2 R18.2 U4.3 | length 167.2
  Top Layer w20: R18.2 2285,8564 2286,8565 2290,8565 2292.6,8567.6 U4.3 2370.71,8567.6 2372.52,8565.79 2372.52,8556.93 2379,8550.45 C20.2
NetD1_1: D1.1 R4.1 | length 113.3
  Top Layer w20: D1.1 4040,8757.97 4057.21,8775.18 4060.18,8775.18 4080,8795 R4.1
NetD2_1: D2.1 D5.1 Q1.3 R6.2 R7.2 | length 1029.9
  Top Layer w30: R6.2 4239,8986 4217.5,9007.5 4217.5,9012.5 4205,9025 D2.1 4200,9101 4218,9119 R7.2 4369,9119 4455,9205 4455,9310 ; D5.1 4455,9310 ; Q1.3 4545.71,9562.83 4455,9472.13 4455,9310
NetD4_2: D4.2 Q1.4 VCC+.1 X1.2 | length 1024.4
  Top Layer w50: X1.2 4727,9723 4980.71,9723 5010,9693.71 5010,9340 5155,9195 D4.2
  other v1: 4550,8845 4661.67,8845 4773.33,8845 4885,8845 4996.67,8845 4550,8891.67 4661.67,8891.67 4773.33,8891.67 4885,8891.67 4996.67,8891.67 4550,8938.33 4661.67,8938.33 4773.33,8938.33 4885,8938.33 4996.67,8938.33 4550,8985 4661.67,8985 4773.33,8985 4885,8985 4996.67,8985
NetD5_2: D5.2 D9.2 | length 130
  Top Layer w30: D9.2 D5.2
NetD6_1: D6.1 R13.1 | length 108.7
  Top Layer w20: D6.1 4060.18,7390.19 4060.18,7414.19 4066,7420 R13.1
NetD7_1: D7.1 D10.1 Q2.3 R14.2 R15.2 | length 964.1
  Top Layer w20: D7.1 4207.97,7665 4225.19,7647.79 4225.19,7641.84 4251.03,7616 R14.2
  Top Layer w30: D7.1 4202.5,7665 4190,7677.5 R15.2 4359,7759 4485,7885 4485,7935 ; D10.1 4480,7940 4485,7935 ; Q2.3 4485,8023.54 4485,7935
NetD9_1: D9.1 Q1.2 R7.1 R9.2 | length 1021.3
  Top Layer w20: R9.2 4018,9127 4018,9143 4066,9191 R7.1
  Top Layer w25: D9.1@4194.32,9310 4209.23,9295.1 4209.23,9290.77 4225,9275 R7.1
  Top Layer w30: D9.1 4194.32,9310 4195,9310 4275,9390 4327.3,9390 4389.33,9452.02 4389.33,9559.33 4460,9630 4575.38,9630 4592.95,9612.43 Q1.2
NetD10_2: D10.2 D11.2 | length 130
  Top Layer w30: D11.2 D10.2
NetD11_1: D11.1 Q2.2 R15.1 R16.2 | length 938.3
  Top Layer w20: R16.2 4016,7688 4157,7829 R15.1@4188,7829
  Top Layer w30: R15.1 D11.1 4195,7940 4280,8025 4370,8025 4395,8050 4395,8100 4455,8160 4570.36,8160 4592.95,8137.4 Q2.2
PWM_H: Power.5 PWM_H.1 R17.1 | length 1505.7
  Top Layer w20: PWM_H.1 1695.95,7999.05 1695.95,8049.05 1575,8170 1575,8709.13 1648.54,8782.68 Power.5 2091.32,8782.68 2225,8649 R17.1
PWM_H_5V: U1.1 U4.6 | length 961.2
  Top Layer w20: U4.6 2473.42,8642.4 2475.23,8644.21 2475.23,8670.23 2925,9120 U1.1
PWM_L: Power.4 PWM_L.1 R18.1 | length 1626.5
  Top Layer w20: Power.4 1855,8682.68 ; PWM_L.1 1855,7900 1855,8682.68 ; R18.1 2225,8564 2224,8565 2220,8565 2102.32,8682.68 1855,8682.68
PWM_L_5V: U2.1 U4.4 | length 1209.2
  Top Layer w20: U4.4 2477.01,8567.6 2745,8299.61 2745,8080 3060,7765 U2.1
S_H: R9.1 S_H.1 U1.15 | length 495.5
  Top Layer w20: U1.15 3710,9070 3765,9125 R9.1 3944,9138 3965,9159 S_H.1
S_L: R16.1 S_L.1 U2.15 | length 545.1
  Top Layer w20: U2.15 3734.44,7715 3834.44,7815 S_L.1 3965,7799.1 3944,7778.1 R16.1
pads on no net: OUT.1 U1.2 U1.7 U1.12 U1.13 U2.2 U2.7 U2.12 U2.13

## Polygon pours and split planes (outlines as drawn)
8V_H on Top Layer "8V_H" (solid, pour order 4): 3525,9875 4340,9875 4340,8700 3525,8700
NetD4_2 on Top Layer "VCC+" (solid, pour order 12): 4490,9240 5255,9240 5255,8725 4490,8725
8V_L on Top Layer "8V_L" (solid, pour order 5): 3525,8545 4340,8545 4340,7370 3525,7370
12V on Top Layer "12V" (solid, pour order 0): 1540,9970 3300,9970 3300,7214.09 1540,7214.09
NetC14_1 on Top Layer "VCC-" (solid, pour order 19): 4615,8525 5330,8525 5330,7870 4615,7870 4615,7872.29
NetC6_1 on Top Layer "OUT" (solid, pour order 11): 5115,9320 5500,9320 5500,9725 5245,9725 5245,9590 5115,9590
NetC6_1 on Top Layer "OUT" (solid, pour order 14): 4465,7675 5015,7675 5015,7825 5145,7825 5145,7640 4970,7465 4465,7465
NetC6_1 on Top Layer "OUT" (solid, pour order 16): 4615,9610 4920,9610 4920,9340 4615,9340
GND on Bottom Layer "GND" (solid, pour order 1): 1540,9970 3300,9970 3300,7214.09 1540,7214.09
GND_L on Bottom Layer "GND_L" (solid, pour order 3): 3525,8545 4340,8545 4340,7370 3525,7370
GND_H on Bottom Layer "GND_H" (solid, pour order 2): 3525,9875 4340,9875 4340,8700 3525,8700
NetC14_1 on Layer 1 "VCC-" (solid, pour order 8): 4615,7870 4615,8525 6215,8525 6215,7770 5515,7770 5515,7870
NetD4_2 on Layer 1 "VCC+" (solid, pour order 7): 4490,9240 5525,9240 5525,9375 6215,9375 6215,8725 4490,8725
NetC6_1 on Layer 2 "OUT" (solid, pour order 10): 5065,9950 5065,8045 5015,8045 5015,7675 4465,7675 4465,7235 5515,7235 5515,9950
NetC6_1 on Layer 2 "OUT" (solid, pour order 15): 4620,9610 5105,9610 5105,9340 4620,9340

## Silkscreen, mask and mechanical layers (free items; w line width, h text height)
Top Overlay:
  text "PWM_H" at 1735,8770.66 h60
  text "PWM_L" at 1735,8670.66 h60
  text "GND" at 1735,8560.67 h60
  text "GND" at 1735,8460.67 h60
  text "12V" at 1735,8360 h60
  text "S213-A" at 1995,7406.11 h100
  text "V2.0" at 5315.19,7406.11 h100
  text "Designer:Jisaye" at 1995,7313.78 h100
  text "2025.11.03" at 5315,7313.5 h100
Mechanical 1:
  the board outline again, w10